# EAGLE board health monitor (EAGLE 9.2.0)
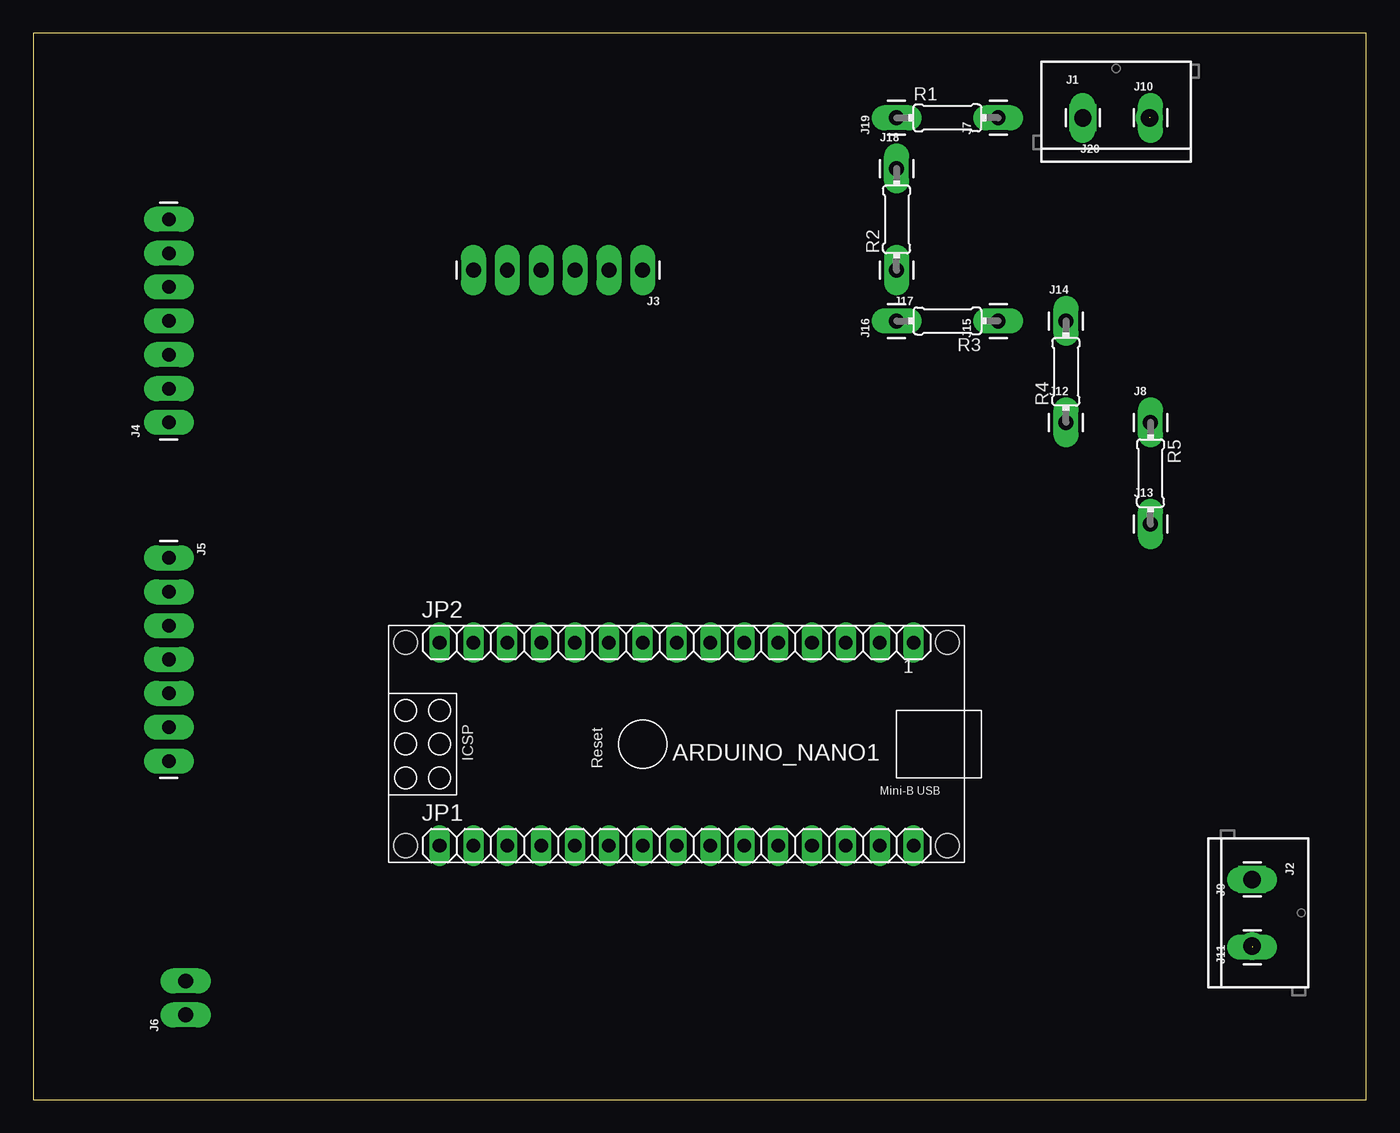
[diagram p0: board, top side]
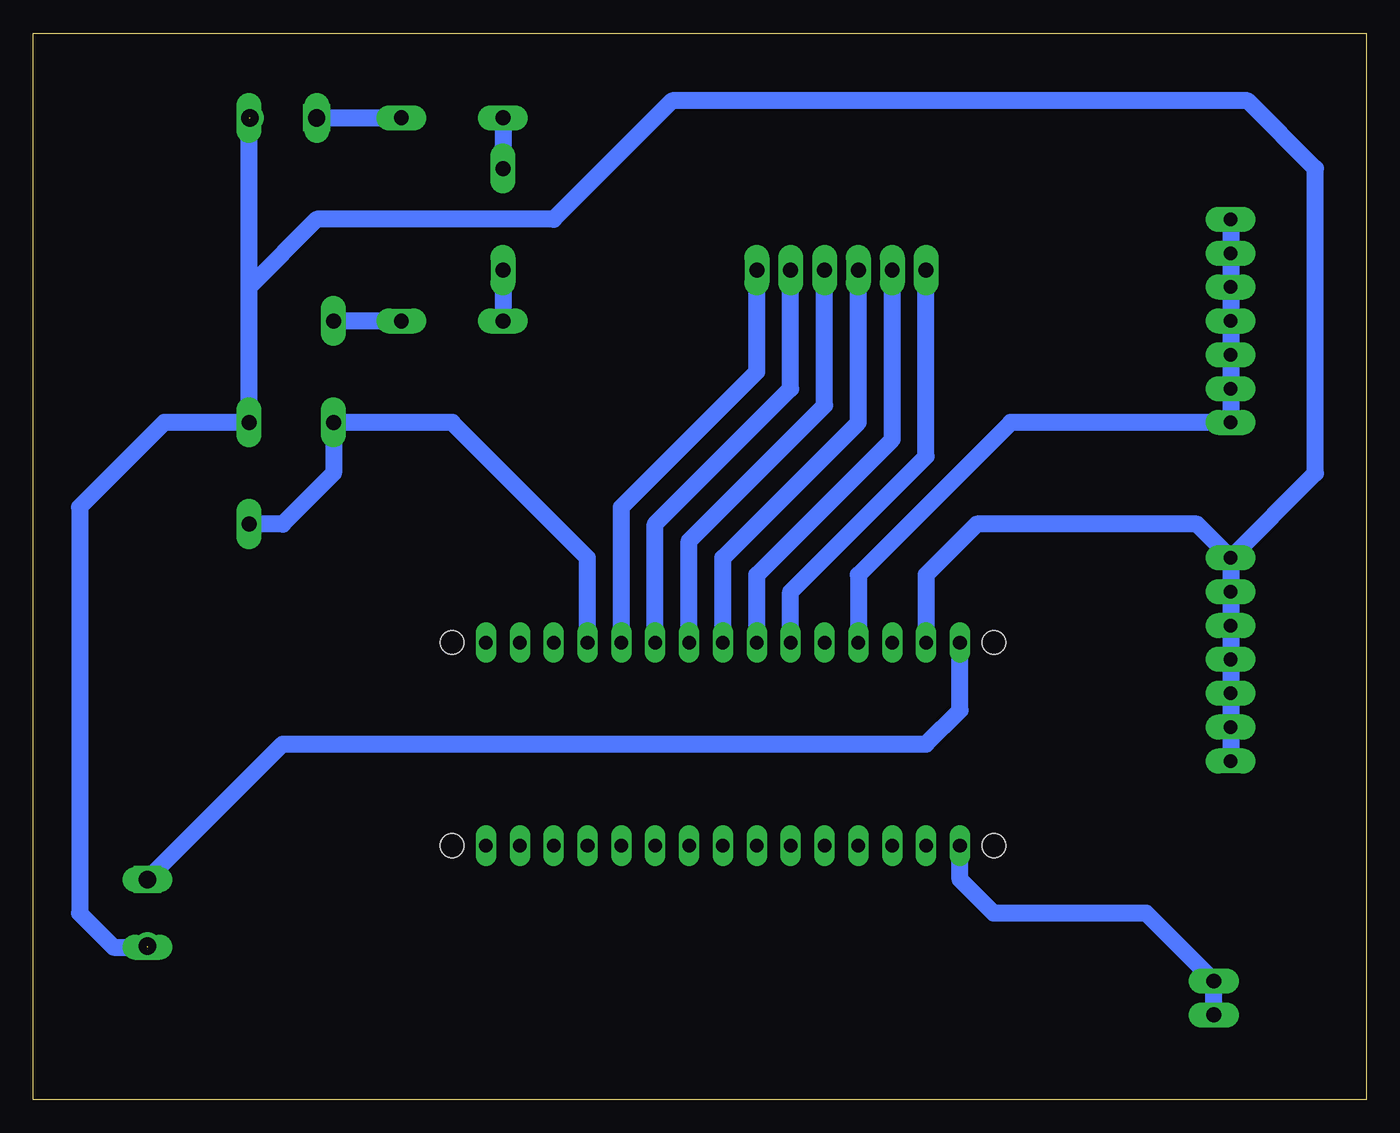
[diagram p1: board, bottom side, seen from below]

Size 100 x 80 mm. Coordinates in mm from the lower left corner, seen from the top.
Outline: 0,0 100,0 100,80 0,80 0,0
Copper layers (1*16): Top 0.035mm / dielectric 1.5mm / Bottom 0.035mm
Design rules "default": minimum track width 6mil, minimum drill 0.35mm, track to track 6mil, track to pad 6mil, pad to pad 6mil, via to via 6mil, smd to smd 6mil, copper to edge 40mil, drill to drill 6mil, minimum pad ring 10mil, minimum via ring 8mil, stop-mask expansion 4mil, vias tented up to drill 0mil, thermal gap 10mil

## Footprints (pad centres in the part's own frame; a part is rotated, then mirrored left to right if it is on the bottom)
ARDUINO_NANO = drill 0.8 square: 1 -20.32,-7.62 | drill 0.8: 2 -17.78,-7.62; 3 -15.24,-7.62; 4 -12.7,-7.62; 5 -10.16,-7.62; 6 -7.62,-7.62; 7 -5.08,-7.62; 8 -2.54,-7.62; 9 0,-7.62; 10 2.54,-7.62; 11 5.08,-7.62; 12 7.62,-7.62; 13 10.16,-7.62; 14 12.7,-7.62; 15 15.24,-7.62; 16 15.24,7.62; 17 12.7,7.62; 18 10.16,7.62; 19 7.62,7.62; 20 5.08,7.62; 21 2.54,7.62; 22 0,7.62; 23 -2.54,7.62; 24 -5.08,7.62; 25 -7.62,7.62; 26 -10.16,7.62; 27 -12.7,7.62; 28 -15.24,7.62; 29 -17.78,7.62; 30 -20.32,7.62 | hole 1.778: -22.86,-7.62; -22.86,7.62; 17.78,7.62; 17.78,-7.62
SCREWTERMINAL-5MM-2 = drill 1.3 pad 2.032 square: 1 0,0 | drill 1.3 pad 2.032: 2 5,0
1X06_LONGPADS = drill 1.118 pad 1.88 long: 1 0,0; 2 2.54,0; 3 5.08,0; 4 7.62,0; 5 10.16,0; 6 12.7,0
1X07_LONGPADS = drill 1.016 pad 1.88 long: 1 0,0; 2 2.54,0; 3 5.08,0; 4 7.62,0; 5 10.16,0; 6 12.7,0; 7 15.24,0
1X02_LONGPADS = drill 1.118 pad 1.88 long: 1 0,0; 2 2.54,0
1X01_LONGPAD = drill 1.118 pad 1.88 long: 1 0,0
1X15 = drill 1.016 long: 1 -17.78,0; 2 -15.24,0; 3 -12.7,0; 4 -10.16,0; 5 -7.62,0; 6 -5.08,0; 7 -2.54,0; 8 0,0; 9 2.54,0; 10 5.08,0; 11 7.62,0; 12 10.16,0; 13 12.7,0; 14 15.24,0; 15 17.78,0
0204/7 = drill 0.813 octagon: 1 -3.81,0; 2 3.81,0

## Placement (x,y rotation side)
ARDUINO_NANO1  [ARDUINO_NANO]  45.72,26.67 180 top
J1  [SCREWTERMINAL-5MM-2]  78.74,73.66 0 top
J2  [SCREWTERMINAL-5MM-2]  91.44,16.51 270 top
J3  [1X06_LONGPADS]  45.72,62.23 180 top
J4  [1X07_LONGPADS]  10.16,50.8 90 top
J5  [1X07_LONGPADS]  10.16,40.64 270 top
J6  [1X02_LONGPADS]  11.43,6.35 90 top
J7  [1X01_LONGPAD]  72.39,73.66 90 top
J8  [1X01_LONGPAD]  83.82,50.8 0 top
J9  [1X01_LONGPAD]  91.44,16.51 90 top
J10  [1X01_LONGPAD]  83.82,73.66 0 top
J11  [1X01_LONGPAD]  91.44,11.43 90 top
J12  [1X01_LONGPAD]  77.47,50.8 0 top
J13  [1X01_LONGPAD]  83.82,43.18 0 top
J14  [1X01_LONGPAD]  77.47,58.42 0 top
J15  [1X01_LONGPAD]  72.39,58.42 90 top
J16  [1X01_LONGPAD]  64.77,58.42 90 top
J17  [1X01_LONGPAD]  64.77,62.23 180 top
J18  [1X01_LONGPAD]  64.77,69.85 0 top
J19  [1X01_LONGPAD]  64.77,73.66 90 top
J20  [1X01_LONGPAD]  78.74,73.66 180 top
JP1  [1X15]  48.26,19.05 0 top
JP2  [1X15]  48.26,34.29 0 top
R1  [0204/7]  68.58,73.66 0 top
R2  [0204/7]  64.77,66.04 90 top
R3  [0204/7]  68.58,58.42 180 top
R4  [0204/7]  77.47,54.61 90 top
R5  [0204/7]  83.82,46.99 270 top

## Library data of the parts
ARDUINO_NANO1 = ArduinoNanoV30
J1 J2 = SparkFun-Connectors; SF_SKU: PRT-08432
J3-J20 = SparkFun-Connectors
JP1 JP2 = pinhead
R1-R5 = eagle-ltspice; SPICEMODEL: NONE; SPICEPREFIX: R

## Nets
N$2: ARDUINO_NANO1.17
N$3: ARDUINO_NANO1.18
N$4: ARDUINO_NANO1.19
N$5: ARDUINO_NANO1.20
N$6: ARDUINO_NANO1.21
N$7: ARDUINO_NANO1.22
N$8: ARDUINO_NANO1.23
N$9: ARDUINO_NANO1.24
N$10: ARDUINO_NANO1.25
N$11: ARDUINO_NANO1.26
N$12: ARDUINO_NANO1.27
N$13: ARDUINO_NANO1.28
N$14: ARDUINO_NANO1.29
N$15: ARDUINO_NANO1.30
N$18: ARDUINO_NANO1.13 JP2.3
N$19: ARDUINO_NANO1.12 J4.1 J4.2 J4.3 J4.4 J4.5 J4.6 J4.7 JP2.4
N$20: ARDUINO_NANO1.11 JP2.5
N$28: ARDUINO_NANO1.3 JP2.13
N$29: ARDUINO_NANO1.2 JP2.14
N$30: ARDUINO_NANO1.1 JP2.15
N$31: ARDUINO_NANO1.16 J6.1 J6.2
N$48: ARDUINO_NANO1.15 J2.1 J9.1 JP2.1
N$50: J1.1 J7.1 J20.1 R1.2
N$51: ARDUINO_NANO1.10 J3.6 JP2.6
N$52: ARDUINO_NANO1.9 J3.5 JP2.7
N$53: ARDUINO_NANO1.8 J3.4 JP2.8
N$54: ARDUINO_NANO1.7 J3.3 JP2.9
N$55: ARDUINO_NANO1.6 J3.2 JP2.10
N$56: ARDUINO_NANO1.5 J3.1 JP2.11
N$58: J16.1 J17.1 R2.1 R3.2
N$60: J18.1 J19.1 R1.1 R2.2
N$63: ARDUINO_NANO1.14 J1.2 J2.2 J5.1 J5.2 J5.3 J5.4 J5.5 J5.6 J5.7 J8.1 J10.1 J11.1 JP2.2 R5.1
N$64: ARDUINO_NANO1.4 J12.1 J13.1 JP2.12 R4.1 R5.2
N$66: J14.1 J15.1 R3.1 R4.2

## Tracks (layer width: path | path; a pad name or v marks a point on that pad's centre or on a via)
GND
  pour Bottom (isolate 12.7): 0,80.01 100.33,80.01 100.33,0 0,0
N$19
  Bottom 1.27: J4.7 J4.6 J4.5 J4.4 J4.3 J4.2 J4.1 26.67,50.8 38.1,39.37 JP2.4
N$31
  Bottom 1.27: J6.1 J6.2 16.51,13.97 27.94,13.97 30.48,16.51 ARDUINO_NANO1.16
N$48
  Bottom 1.27: J9.1 81.28,26.67 33.02,26.67 30.48,29.21 JP2.1
N$50
  Bottom 1.27: J20.1 J7.1
N$51
  Bottom 1.27: JP2.6 43.18,38.1 33.02,48.26 J3.6
N$52
  Bottom 1.27: JP2.7 45.72,39.37 35.56,49.53 J3.5
N$53
  Bottom 1.27: JP2.8 48.26,40.64 38.1,50.8 J3.4
N$54
  Bottom 1.27: JP2.9 50.8,41.91 40.64,52.07 J3.3
N$55
  Bottom 1.27: JP2.10 53.34,43.18 43.18,53.34 J3.2
N$56
  Bottom 1.27: JP2.11 55.88,44.45 45.72,54.61 J3.1
N$58
  Bottom 1.27: J17.1 J16.1
N$60
  Bottom 1.27: J19.1 J18.1
N$63  (2 unrouted)
  Bottom 1.27: J5.1 J5.2 J5.3 J5.4 J5.5 J5.6 J5.7 | J11.1 93.98,11.43 96.52,13.97 96.52,44.45 90.17,50.8 J8.1 83.82,60.96 | 83.82,60.96 J10.1 | J5.1 12.7,43.18 29.21,43.18 33.02,39.37 JP2.2 | J5.1 3.81,46.99 3.81,69.85 8.89,74.93 52.07,74.93 60.96,66.04 78.74,66.04 83.82,60.96
N$64
  Bottom 1.27: J13.1 81.28,43.18 77.47,46.99 J12.1 68.58,50.8 58.42,40.64 JP2.12
N$66
  Bottom 1.27: J15.1 J14.1